# Altium PCB mcc_dac_amp.PcbDoc
Units mil, origin at the board's own origin, x right, y up, seen from the top; angles counter-clockwise.
Board outline 2125 x 4250 mil, 2 copper layers (Top Layer, Bottom Layer); 4 components, 5 nets, 46 pads, 0 vias.
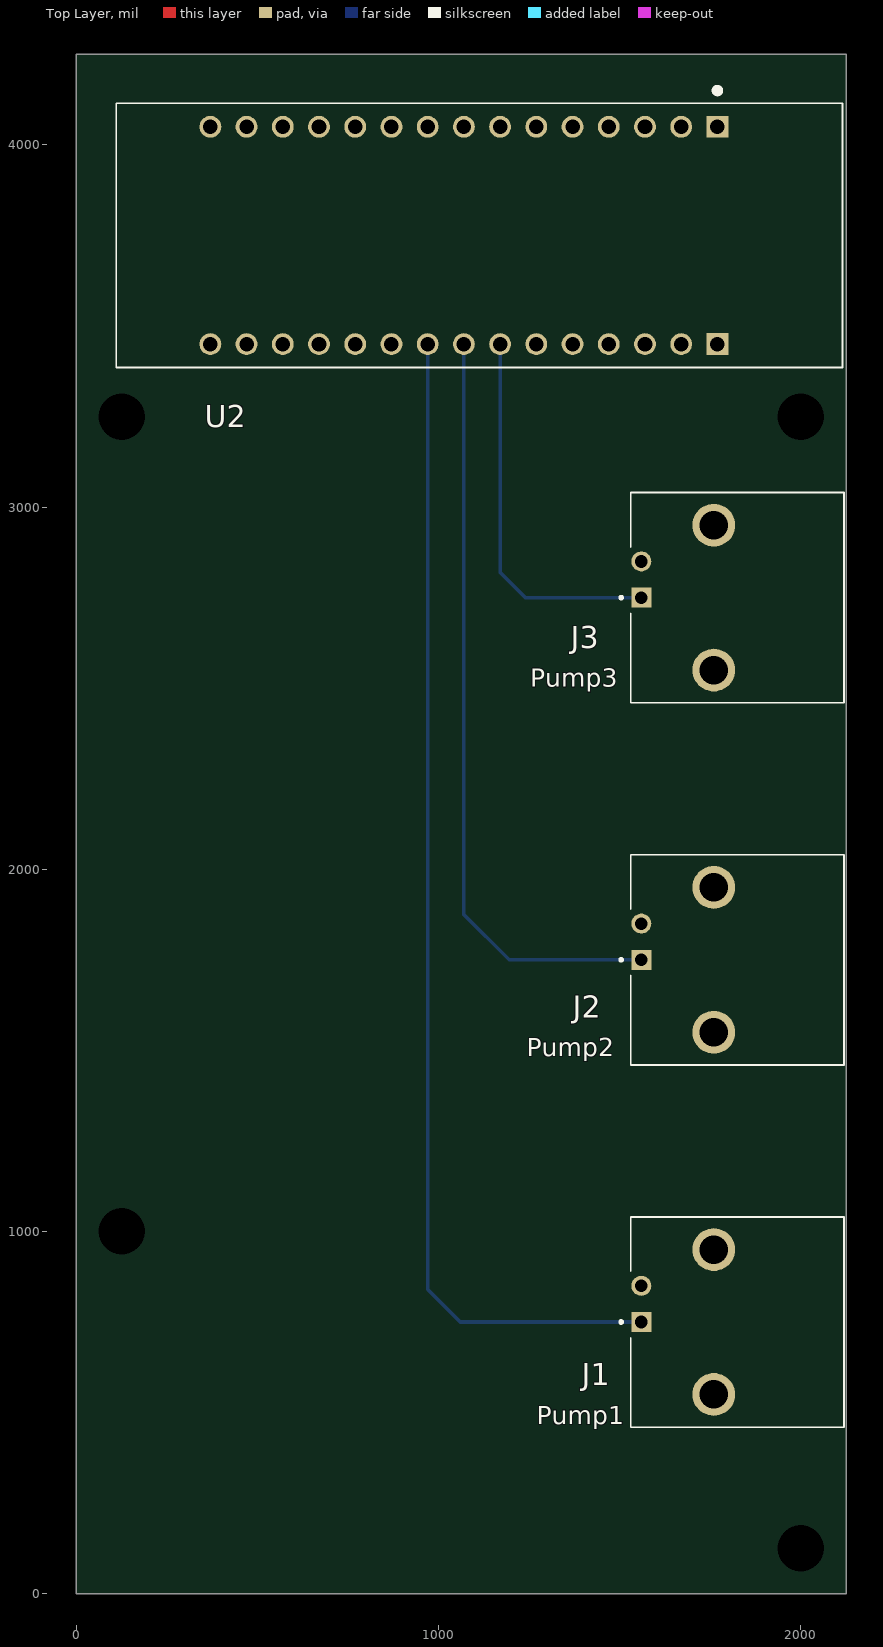
[diagram p0: Top Layer view]
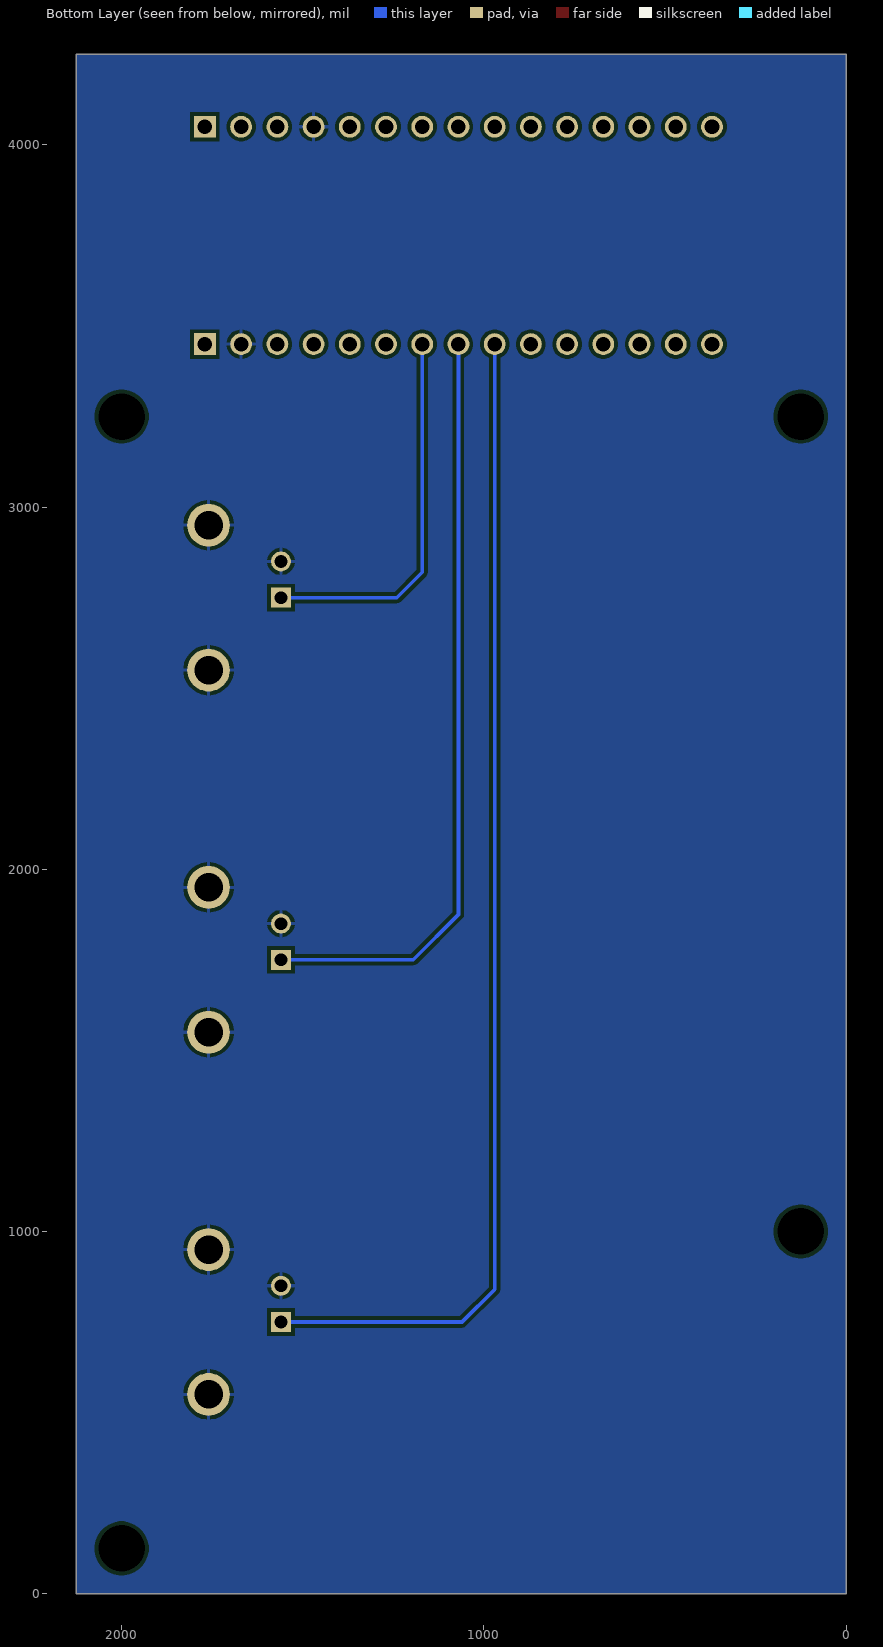
[diagram p1: Bottom Layer view, seen from below]
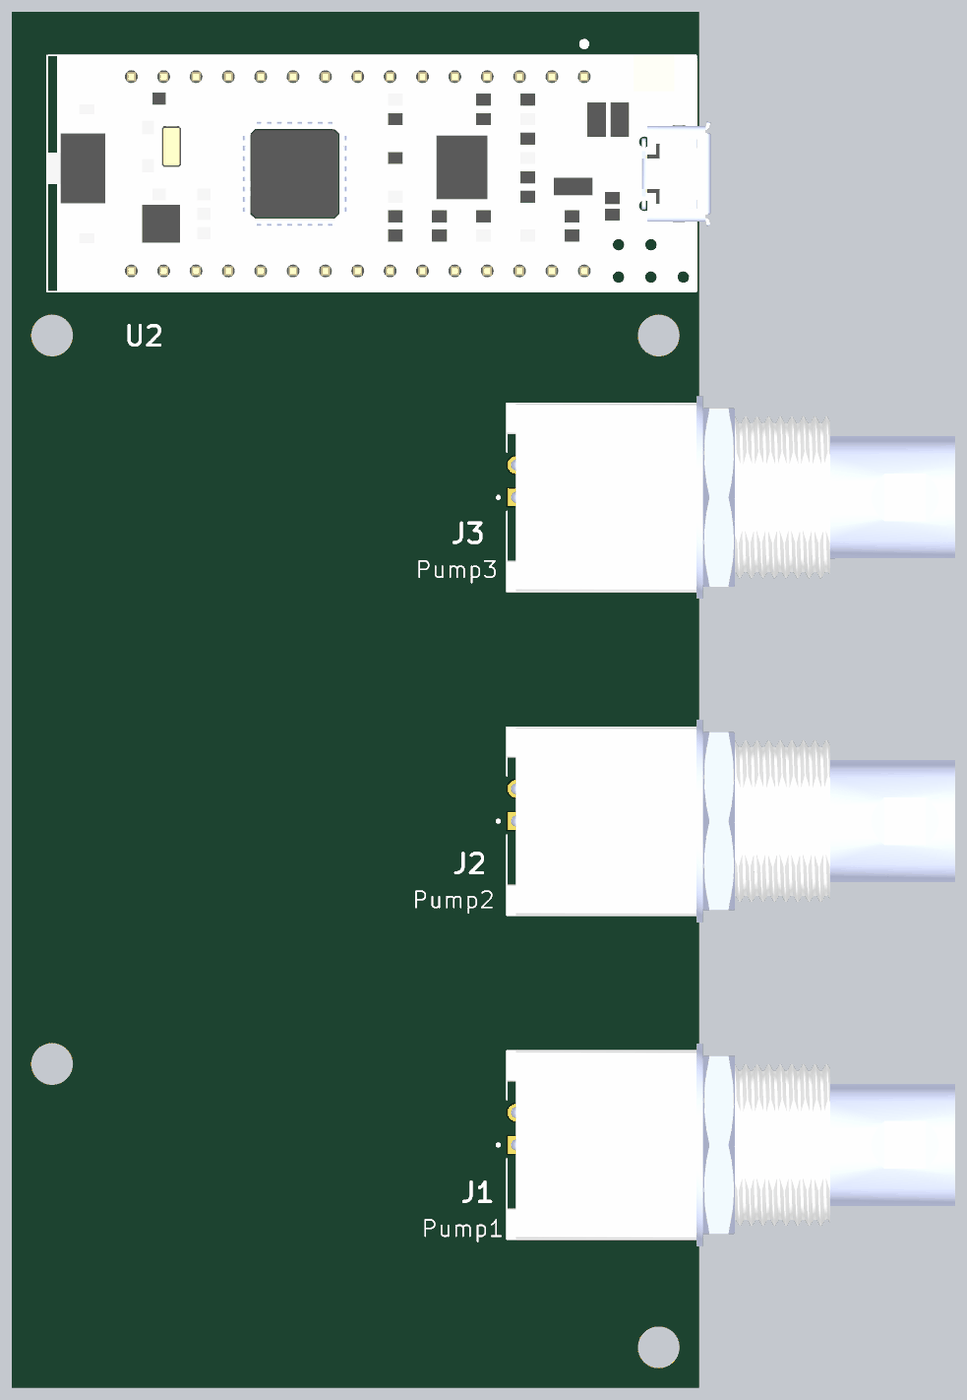
[diagram p2: 3D render of the assembled board from above, using the file's embedded part models]

## Layer stack, top to bottom
Top Solder: solder mask 0.4, Solder Resist, Dk 3.5
Top Layer: signal copper 1.4
Dielectric 1: dielectric 12.6, FR-4, Dk 4.8
Bottom Layer: signal copper 1.4
Bottom Solder: solder mask 0.4, Solder Resist, Dk 3.5

## Board outline
0,0 2125,0 2125,4250 0,4250

## Design rules (kind name [scope] priority, off if disabled: settings)
Clearance [All] p1: gap=10 ignorepadtopadclearanceinfootprint=FALSE
HoleSize [All] p1: absolutevalues=TRUE maxlimit=130 minlimit=1 maxpercent=80.000 minpercent=20.000
PolygonConnect [All] p1: connectstyle=Relief reliefconductorwidth=10 reliefentries=4 polygonreliefangle="90 Angle" airgapwidth=10
RoutingVias [All] p1: holewidth=28 width=50 viastyle="Through Hole" minholewidth=28 minwidth=50 maxholewidth=28 maxwidth=50
SolderMaskExpansion [All] p1: expansion=4 istentingtop=FALSE
Width [All] p1: maxlimit=10 minlimit=10 preferedwidth=10
29 further rules are at their usual default settings.

## Components (designator, comment, footprint, x,y, rotation, side; value= is the part's Value field where it differs from the comment)
J1 "Pump1" LINX_CONBNC002 1760,750 r90 top
J2 "Pump2" LINX_CONBNC002 1760,1750 r90 top
J3 "Pump3" LINX_CONBNC002 1760,2750 r90 top
U2 "NUCLEO-F303K8" MODULE_NUCLEO-F303K8 1070,3750 r270 top

## Footprints (in the part's own frame and the unit in brackets; to place one, negate y for a bottom-side part, rotate by r counter-clockwise, add the part's x,y. Pads: shape width x height; smd on the part's side, far side on the other; paste and mask are expansions set on the pad)
LINX_CONBNC002 [mm]
  rect 1.398x1.398 hole 0.89: 1(0,5.08)
  round 1.398 hole 0.89: 2(2.54,5.08)
  round 3 hole 2: S1(-5.08,0) S2(5.08,0)
  silkscreen extent -7.37,-9.12 7.37,6.6, body extent -7.95,-29.38 7.95,5.82, height 14.89
MODULE_NUCLEO-F303K8 [mm]
  rect 1.53x1.53 hole 1.02: 3_1(-7.62,17.78) 4_1(7.62,17.78)
  round 1.53 hole 1.02: 3_2(-7.62,15.24) 3_3(-7.62,12.7) 3_4(-7.62,10.16) 3_5(-7.62,7.62) 3_6(-7.62,5.08) 3_7(-7.62,2.54) 3_8(-7.62,0) 3_9(-7.62,-2.54) 3_10(-7.62,-5.08) 3_11(-7.62,-7.62) 3_12(-7.62,-10.16) 3_13(-7.62,-12.7) 3_14(-7.62,-15.24) 3_15(-7.62,-17.78) 4_2(7.62,15.24) 4_3(7.62,12.7) 4_4(7.62,10.16) 4_5(7.62,7.62) 4_6(7.62,5.08) 4_7(7.62,2.54) 4_8(7.62,0) 4_9(7.62,-2.54) 4_10(7.62,-5.08) 4_11(7.62,-7.62) 4_12(7.62,-10.16) 4_13(7.62,-12.7) 4_14(7.62,-15.24) 4_15(7.62,-17.78)
  silkscreen extent -10.36,-24.38 9.27,26.54, body extent -9.27,-24.3 9.29,27.71, height 8.49

## Part data
J1 J2 J3: library part CONBNC002, "CONBNC002", Package=None, Availability=Unavailable, MF="{'manufacturer': u'TE Connectivity'}", MP=CONBNC002, Price=None
U2: Package=None, Availability=Unavailable, MF="{'manufacturer': u'STMicroelectronics'}", MP=NUCLEO-F303K8, Price=None

## Free pads (board coordinates)
  round 0 hole 128.5: 2(125,1000) 2(125,3250) 2(2000,125) 2(2000,3250)

## Nets (pads, with @x,y where several pads share a name; then routed paths per layer and width w, separated by ;. In a path a pad name is that pad's centre, name@x,y a point inside that pad or via, vN(x,y) a via of type N, cw(c..) or ccw(c..) an arc to the next point about the centre after c; other vN are vias at no path point)
3V3: U2.4_14
DAC1.1: J1.1 U2.4_9 | length 3237.3
  Bottom Layer w10: U2.4_9 970,840 1060,750 J1.1
DAC1.2: J2.1 U2.4_8 | length 2116.8
  Bottom Layer w10: U2.4_8 1070,1875 1195,1750 J2.1
DAC2.1: J3.1 U2.4_7 | length 1049
  Bottom Layer w10: U2.4_7 1170,2820 1240,2750 J3.1
GND: J1.2 J1.S1 J1.S2 J2.2 J2.S1 J2.S2 J3.2 J3.S1 J3.S2 U2.3_4 U2.4_2
pads on no net: U2.3_1 U2.3_2 U2.3_3 U2.3_5 U2.3_6 U2.3_7 U2.3_8 U2.3_9 U2.3_10 U2.3_11 U2.3_12 U2.3_13 U2.3_14 U2.3_15 U2.4_1 U2.4_3 U2.4_4 U2.4_5 U2.4_6 U2.4_10 U2.4_11 U2.4_12 U2.4_13 U2.4_15

## Polygon pours and split planes (outlines as drawn)
GND on Bottom Layer "NONET_L-01_P-001" (solid, pour order 0): 0,0 0,4250 2125,4250 2125,0

## Text inside footprints (layer, text, board x,y; h text height)
J1: Top 3D Body "PCB EDGE" at 2060,1100 h70 r90
J2: Top 3D Body "PCB EDGE" at 2060,2100 h70 r90
J3: Top 3D Body "PCB EDGE" at 2060,3100 h70 r90